# Allegro board usb-dvt-324pm1630.brd
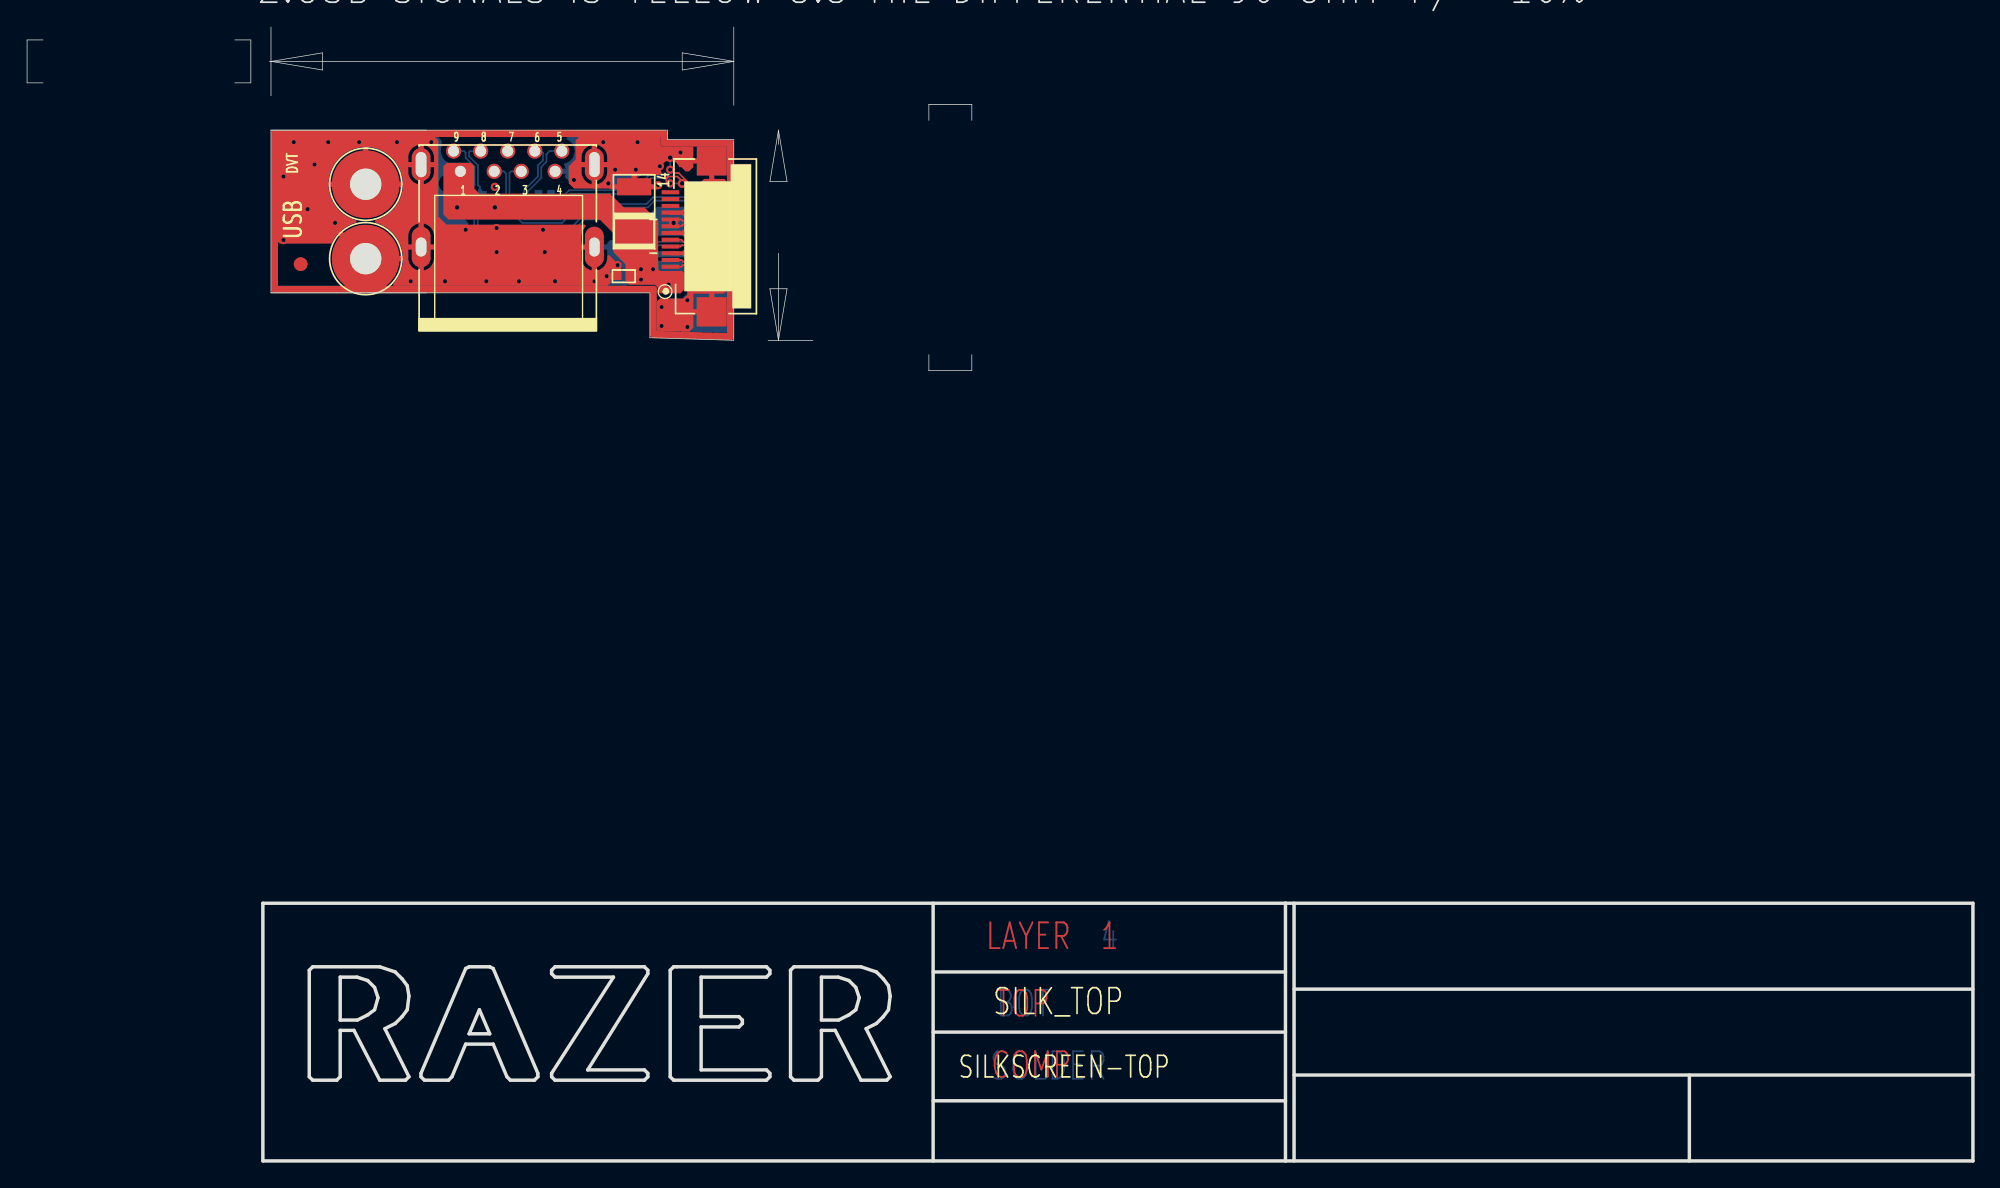
[diagram p0: board, top side]
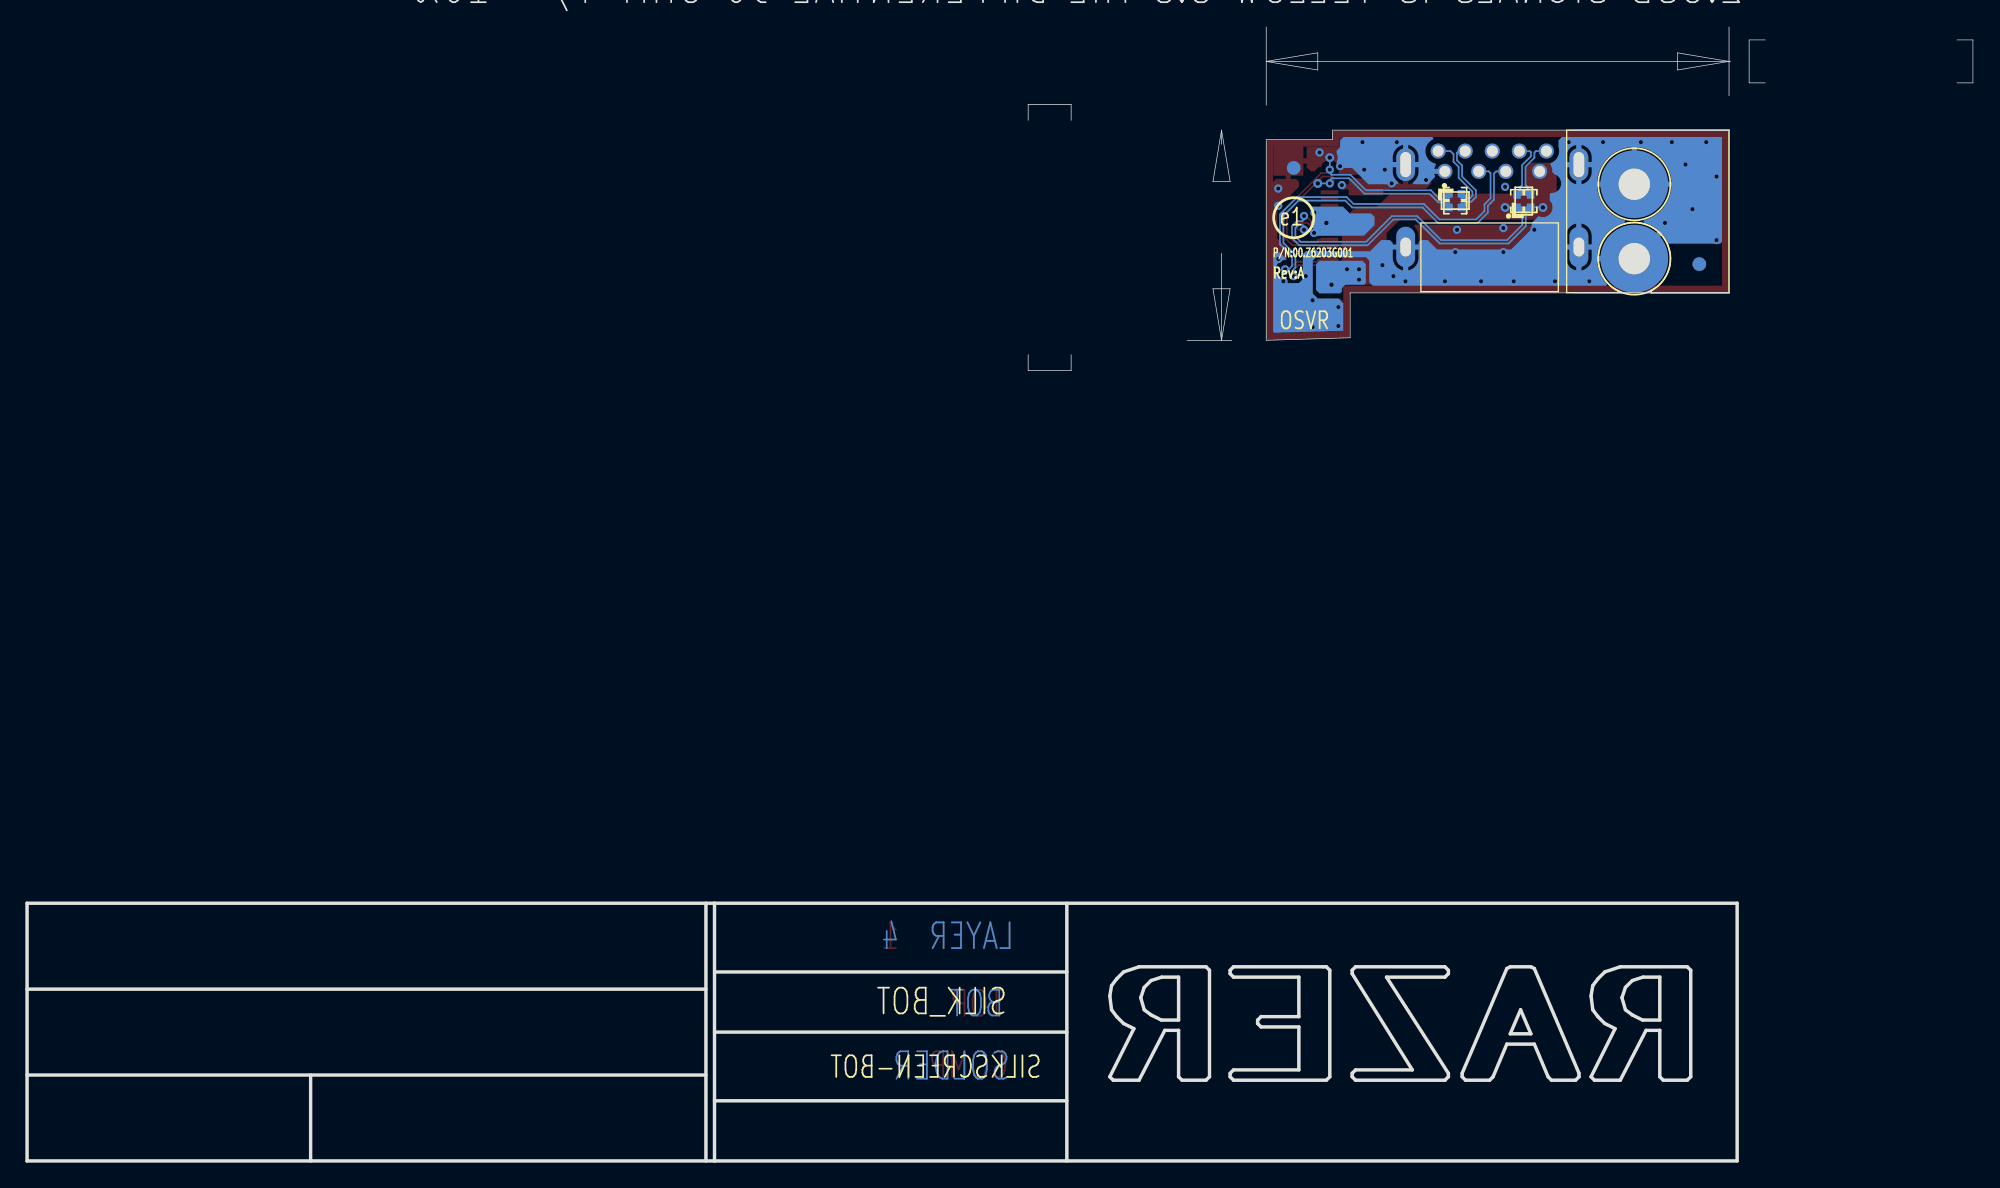
[diagram p1: board, bottom side, seen from below]

Outline 143.79 x 83.82 mm; copper layers: TOP, IN1, IN2, BOTTOM. Coordinates in mm from the lower left corner of the outline.
Outline path: 18.02,76.2 18.02,64.17 ; 18.02,76.2 29.52,76.2 ; 18.02,76.2 47.32,76.2 47.32,75.5 52.22,75.5 52.22,60.66 46.02,60.85 46.02,64.17 18.02,64.17 ; 18.02,64.17 29.52,64.17

## Design rules (mm)
net group DIFFPAIR34: nets SSRX+_R SSRX-_R
net group DIFFPAIR35: nets SSRX+ SSRX-
net group DIFFPAIR36: nets SSTX+_R SSTX-_R
net group DIFFPAIR37: nets SSTX+ SSTX-
net group DIFFPAIR38: nets D+ D-

## Placement (name value [footprint] x y rotation side)
C1000  6TPE220MAZB  [TANB]  44.86 70.36 90 top
C1001  470pF_X7R_50V  [C0402]  44.09 65.41 180 top
CN100  -  [SINGATRON_2UB4006-400101F]  35.52 64.35 0 top
J100  ACES_14PIN_FPC  [ACES_50502-14]  47.54 68.35 90 top
L1000  X_80_100MHz  [DLP11T]  38.25 70.99 180 bottom
L1001  X_80_100MHz  [DLP11T]  33.19 70.96 90 bottom
MT1001  MOUNTING HOLE  [HOLEC197D91]  25.02 72.2 90 top
MT1002  MOUNTING HOLE  [HOLEC197D91]  25.02 66.7 90 top
NOREF  -  []  18.02 76.2 0 top
NOREF#2  -  []  17.42 0 0 top
NOREF#3  -  []  -23.06 54.52 90 top
NOREF#4  -  []  -18.06 231.86 90 top
NOREF#5  -  []  -23.06 236.86 0 top
NOREF#6  -  [unnamed#2]  20.22 66.29 0 top
NOREF#7  -  []  52.22 60.66 90 top
NOREF#8  -  []  -23.06 236.86 0 top
NOREF#9  -  [unnamed#2]  20.22 66.29 180 bottom
NOREF#10  -  [unnamed#2]  50.19 73.41 180 bottom
R1000  0  [R0402]  38.25 71.5 0 bottom
R1001  0  [R0402]  38.25 70.48 0 bottom
R1002  0  [R0402]  33.7 70.96 270 bottom
R1003  0  [R0402]  32.68 70.96 270 bottom

## Library data of the parts
C1000 = TANB
C1001 = C0402
CN100 = SINGATRON_2UB4006-400101F
J100 = ACES_50502-14
L1000 L1001 = DLP11T
MT1001 MT1002 = HOLEC197D91
R1000-R1003 = R0402

## Footprints (pads in the part's own frame, mm; a bottom-side part is the same pattern mirrored in y, then rotated)
ACES_50502-14
  rect 0.305x1.295 smd: 1(-3.25,0) 2(-2.75,0) 3(-2.25,0) 4(-1.75,0) 5(-1.25,0) 6(-0.75,0) 7(-0.25,0) 8(0.25,0) 9(0.75,0) 10(1.25,0) 11(1.75,0) 12(2.25,0) 13(2.75,0) 14(3.25,0)
  rect 2.159x2.21 smd: S1(-5.575,-3.05) S2(5.575,-3.05)
C0402
  rect 0.559x0.559 smd: 1(-0.457,0) 2(0.457,0)
DLP11T
  rect 0.508x0.305 smd: 1(-0.625,0.275) 2(0.625,0.275) 3(0.625,-0.275) 4(-0.625,-0.275)
HOLEC197D91
  round 5.004 hole 2.311: 1(0,0)
R0402
  rect 0.559x0.559 smd: 1(-0.457,0) 2(0.457,0)
SINGATRON_2UB4006-400101F
  round 1.118 hole 0.813: 1(-3.5,8.8) 2(-1,8.8) 3(1,8.8) 4(3.5,8.8) 5(4,10.3) 6(2,10.3) 7(0,10.3) 8(-2,10.3) 9(-4,10.3)
  oval 1.397x2.438 hole 0.787x1.854: G1(-6.4,9.3) G2(6.4,9.3)
  oval 1.397x2.997 hole 0.787x1.397: G3(-6.4,3.208) G4(6.4,3.208)
TANB
  rect 1.27x2.54 smd: 1(-1.651,0) 2(1.651,0)
unnamed#2
  round 1.016 smd: 1(0,0)

## Nets
5V: C1000.1 C1001.1 CN100.1 J100.1 J100.2
D+: CN100.3 J100.4
D-: CN100.2 J100.3
SSRX+: J100.7 L1000.4 R1001.2
SSRX+_R: CN100.6 L1000.3 R1001.1
SSRX-: J100.6 L1000.1 R1000.2
SSRX-_R: CN100.5 L1000.2 R1000.1
SSTX+: J100.10 L1001.4 R1003.2
SSTX+_R: CN100.9 L1001.3 R1003.1
SSTX-: J100.9 L1001.1 R1002.2
SSTX-_R: CN100.8 L1001.2 R1002.1
USB_GND: C1000.2 C1001.2 CN100.4 CN100.7 CN100.G1 CN100.G2 CN100.G3 CN100.G4 J100.5 J100.8 J100.11 J100.S1 J100.S2 MT1001.1 MT1002.1

Pads without a net: J100 12 13 14; NOREF#6 1; NOREF#9 1; NOREF#10 1

## Via types
v1: diameter 0.61, hole 0.305, TOP to BOTTOM, 54 vias
v2: diameter 0.66, hole 0.33, TOP to BOTTOM, 6 vias

## Routing (per net, layer and track width the routed paths; a pad name or vN(x,y) marks a point on that pad's centre or on a via; arc(x,y) is an arc through that point)
5V:
  vias: v1(45.36,65.91) v1(45.36,65.15) v1(46.25,65.91) v2(47.4,64.77)
D+: length 28.9
  TOP w0.127: v1(50.83,65.91) 50.55,65.91 49.99,66.48 48.47,66.48 48.35,66.6 J100.4
  BOTTOM w0.127: CN100.3 35.77,73.15 35.65,73.03 35.65,71.16 36.09,70.72 36.09,70.21 36.71,69.6 39.42,69.6 40.56,70.74 45.77,70.74 46.27,71.25 49.94,71.25 51.21,69.98 51.21,67.76 50.32,66.87 50.32,66.15 50.55,65.91 v1(50.83,65.91)
D-: length 28.9
  TOP w0.127: J100.3 48.35,66.1 48.47,66.22 49.88,66.22 50.26,65.84 50.26,65.48 v1(50.19,65.41)
  BOTTOM w0.127: v1(50.19,65.41) 50.19,65.91 50.06,66.04 50.06,66.98 50.95,67.87 50.95,69.87 49.83,70.99 46.38,70.99 45.87,70.48 40.67,70.48 39.52,69.34 36.6,69.34 35.84,70.1 35.84,70.61 35.65,70.8 35.39,71.06 35.39,72.99 35.23,73.15 CN100.2
SSRX+: length 21.2
  TOP w0.127: v1(47.52,72.26) 47.4,72.26 47.24,72.42 47.24,72.67 47.35,72.77 48.05,72.77 48.77,72.05 50.7,70.13 50.7,68.45 50.19,67.94 48.5,67.94 48.35,68.1 J100.7
  BOTTOM w0.127: R1001.2 38.71,70.55 L1000.4 38.99,70.72 39.14,70.87 39.52,70.87 40.16,71.5 44.96,71.5 46.1,72.64 47.4,72.64 47.52,72.52 v1(47.52,72.26) v2(48.41,72.26)
SSRX+_R: length 5.9
  BOTTOM w0.127: CN100.6 38,74.65 38.13,74.53 38.13,73.97 37.74,73.59 37.74,72.77 36.73,71.75 36.73,71.25 37.06,70.92 37.31,70.92 37.51,70.72 L1000.3 37.8,70.55 R1001.1
SSRX-: length 21.2
  TOP w0.127: v1(47.52,73.28) 47.78,73.03 48.16,73.03 50.95,70.23 50.95,68.35 50.3,67.69 48.38,67.69 48.29,67.6 J100.6
  BOTTOM w0.127: v2(47.52,74.17) v1(47.52,73.28) 47.52,73.03 47.4,72.9 46,72.9 44.86,71.75 40.05,71.75 39.42,71.12 39.14,71.12 38.99,71.27 L1000.1 38.71,71.44 R1000.2
SSRX-_R: length 5.9
  BOTTOM w0.127: CN100.5 38.61,74.65 38.38,74.42 38.38,73.86 38,73.48 38,72.67 36.98,71.65 36.98,71.35 37.16,71.17 37.42,71.17 37.51,71.27 L1000.2 37.8,71.44 R1000.1
SSTX+: length 26.4
  TOP w0.127: v1(49.43,69.85) 49.3,69.85 48.92,69.48 48.47,69.48 48.35,69.6 J100.10
  BOTTOM w0.127: v2(31.78,70.48) 31.79,70.5 R1003.2 32.75,70.5 L1001.4 32.92,70.23 33.05,70.1 33.05,69.09 34.32,67.82 39.4,67.82 41.17,69.6 42.82,69.6 44.73,67.69 49.79,67.69 50.32,68.22 50.32,69.09 49.94,69.47 49.56,69.47 49.43,69.6 v1(49.43,69.85)
SSTX+_R: length 4.5
  BOTTOM w0.127: CN100.9 32.29,74.65 32.4,74.54 32.4,74.16 33.06,73.5 33.06,72.14 32.92,71.99 L1001.3 32.75,71.42 R1003.1
SSTX-: length 26.3
  TOP w0.127: v1(49.43,68.83) 49.81,68.83 49.91,68.94 49.91,69.22 49.77,69.35 49.17,69.35 49.04,69.22 48.47,69.22 48.35,69.1 J100.9
  BOTTOM w0.127: v2(34.57,70.48) 34.55,70.5 R1002.2 33.63,70.5 L1001.1 33.47,70.27 33.3,70.1 33.3,69.19 34.42,68.07 39.29,68.07 41.07,69.85 42.93,69.85 44.83,67.94 49.68,67.94 50.06,68.33 50.06,68.98 49.83,69.22 49.56,69.22 49.43,69.09 v1(49.43,68.83)
SSTX-_R: length 4.5
  BOTTOM w0.127: CN100.8 33.51,74.64 32.73,74.64 32.66,74.57 32.66,74.26 33.32,73.6 33.32,72.14 33.47,71.99 L1001.2 33.63,71.42 R1002.1
USB_GND: length 169
  TOP w0.279: J100.5 v1(48.71,67.1)
  TOP w0.305: v1(48.67,70.1) J100.11 ; J100.8 v1(48.69,68.6)
  TOP w0.381: CN100.G2 41.92,75.25 ; CN100.G2 40.84,73.65 ; CN100.G2 41.92,72.05 ; CN100.G2 43,73.65 ; v1(44.98,73.28) 44.86,73.15 44.86,72.01 ; CN100.G3 29.12,69.44 ; CN100.G3 30.2,67.56 ; CN100.G3 28.04,67.56 ; CN100.G3 29.12,65.68 ; 27.91,66.7 MT1002.1 22.76,68.96 22.5,68.96 ; 29.12,72.05 CN100.G1 ; CN100.G1 30.2,73.65 ; CN100.G1 29.12,75.25 ; CN100.G1 28.04,73.65 ; 50.59,64.24 J100.S1 49.11,62.77 ; 44.86,72.01 43.21,72.01 v1(42.95,72.26) ; 44.86,72.01 46.51,72.01 v1(46.63,72.14) ; 50.59,72.46 J100.S2 49.11,73.92 ; 22.14,72.2 MT1001.1 ; MT1001.1 25.02,75.08 ; MT1001.1 27.91,72.2 ; 41.92,65.68 CN100.G4 40.84,67.56
  TOP w0.508: v1(42.82,65.41) C1001.2 v1(43.64,66.22)
  IN1 w0.381: 40.84,67.56 CN100.G4 ; CN100.G4 41.92,69.44 ; CN100.G4 43,67.56 ; CN100.G4 41.92,65.68 ; CN100.G2 43,73.65 ; CN100.G2 40.84,73.65 ; CN100.G2 41.92,72.05 ; CN100.G2 41.92,75.25 ; CN100.G3 30.2,67.56 ; CN100.G3 29.12,65.68 ; CN100.G3 28.04,67.56 ; CN100.G3 29.12,69.44 ; 34.58,74.65 CN100.7 ; CN100.7 35.52,73.71 ; CN100.7 36.46,74.65 ; CN100.G1 29.12,75.25 ; CN100.G1 30.2,73.65 ; CN100.G1 28.04,73.65 ; CN100.G1 29.12,72.05 ; MT1002.1 26.94,66.7 ; MT1002.1 23.1,66.7 ; MT1002.1 25.02,68.62 ; 38.08,73.15 CN100.4 ; CN100.4 39.96,73.15 ; CN100.4 39.02,72.21 ; 25.02,70.28 MT1001.1 ; MT1001.1 23.1,72.2 ; MT1001.1 25.02,74.12 ; MT1001.1 26.94,72.2
  IN2 w0.381: 28.04,67.56 CN100.G3 ; CN100.G3 29.12,69.44 ; CN100.G3 30.2,67.56 ; CN100.G3 29.12,65.68 ; MT1002.1 26.94,66.7 ; MT1002.1 23.1,66.7 ; MT1002.1 25.02,68.62 ; 40.84,73.65 CN100.G2 ; CN100.G2 43,73.65 ; CN100.G2 41.92,75.25 ; CN100.G2 41.92,72.05 ; 34.58,74.65 CN100.7 ; CN100.7 36.46,74.65 ; CN100.7 35.52,73.71 ; CN100.G4 43,67.56 ; CN100.G4 41.92,65.68 ; CN100.G4 40.84,67.56 ; CN100.G4 41.92,69.44 ; 29.12,72.05 CN100.G1 ; CN100.G1 28.04,73.65 ; CN100.G1 30.2,73.65 ; CN100.G1 29.12,75.25 ; 23.1,72.2 MT1001.1 ; MT1001.1 25.02,70.28 ; MT1001.1 25.02,74.12 ; MT1001.1 26.94,72.2 ; CN100.4 39.96,73.15 ; CN100.4 38.08,73.15 ; CN100.4 39.02,72.21
  BOTTOM w0.381: 40.84,73.65 CN100.G2 ; CN100.G2 41.92,75.25 ; CN100.G2 43,73.65 ; 41.92,65.68 CN100.G4 ; CN100.G4 40.84,67.56 ; CN100.G4 43,67.56 ; 27.91,66.7 MT1002.1 22.63,69.09 22.5,69.09 ; MT1001.1 27.91,72.2 ; MT1001.1 25.02,75.08 ; MT1001.1 22.14,72.2 ; 29.12,65.68 CN100.G3 ; CN100.G3 30.2,67.56 ; CN100.G3 29.12,69.44 ; CN100.G3 28.04,67.56 ; 28.04,73.65 CN100.G1 ; CN100.G1 30.2,73.65 ; CN100.G1 29.12,72.05 ; CN100.G1 29.12,75.25 ; CN100.4 39.96,73.15
  vias: v1(18.95,72.77) v1(18.95,68.07) v1(19.71,75.31) v1(20.73,70.36) v1(21.23,73.66) v1(22.25,75.31) v1(22.76,69.34) v1(24.54,75.31) v1(27.33,75.31) v1(28.35,65.02) v1(29.87,75.31) v1(30.89,65.02) v1(32.41,68.83) v1(33.93,65.02) v1(34.57,72.01) v1(34.7,68.96) v1(34.7,67.18) v1(36.35,65.02) v1(38.13,68.83) v1(38.25,67.18) v1(39.01,65.02) v1(40.41,72.52) v1(41.94,65.02) v1(42.57,75.31) v1(43.46,73.28) v1(45.11,75.31) v1(46.76,73.53) v1(46.89,63.12) v1(46.89,61.72) v1(48.29,74.55) v1(48.79,63.63) v1(48.79,61.65) v1(49.3,65.41) v1(50.95,65.02) v1(51.33,71.88) v1(51.33,70.61) v1(51.33,66.67) v2(47.78,69.34)

## Copper pours and planes (outline as drawn; the poured copper is in the pictures)
5V on TOP (solid shape): 33.05,73.53 33.05,71.88 33.43,71.5 43.08,71.5 44.09,70.48 45.62,70.48 46.63,69.47 46.63,65.91 46.76,65.79 48.41,65.79 48.54,65.66 48.54,64.39 48.29,64.13 46.76,64.13 46.63,64.26 46.63,64.52 46.38,64.77 44.48,64.77 44.22,65.02 44.22,66.29 43.33,67.18 43.33,68.58 42.32,69.6 31.14,69.6 30.76,69.98 30.76,73.53 31.01,73.79 32.79,73.79
5V on BOTTOM (solid shape): 48.54,66.29 48.54,64.39 48.29,64.13 46.76,64.13 46.63,64.26 46.63,64.52 46.38,64.77 44.98,64.77 44.86,64.9 44.86,66.29 45.11,66.55 48.29,66.55
USB_GND on TOP (solid shape): 51.71,72.39 51.71,64.36 51.46,64.11 49.23,64.11 49.23,61.59 48.94,61.3 46.53,61.37 46.53,63.53 46.76,63.75 48.54,63.75 48.79,64.01 48.79,65.53 48.92,65.66 49.43,65.66 49.52,65.57 49.52,65.54 50.03,64.74 50.85,65.23 51.51,65.94 50.8,66.6 50.73,66.63 50.7,66.7 50.7,67.46 51.4,68.16 51.4,70.42 49.81,72.01 49.81,72.39 50.01,72.59 51.51,72.59
USB_GND on TOP (solid shape): outline of 128 points within 40.03,71.88 49.23,75.69
USB_GND on TOP (solid shape): outline of 414 points within 18.54,64.69 43.84,75.69
USB_GND on BOTTOM (solid shape): 48.91,70.55 49,70.48 48.98,70.37 48.74,69.88 48.93,69.38 48.95,69.34 48.93,69.31 48.75,68.94 48.81,68.54 48.8,68.44 48.72,68.39 45.02,68.39 44.22,69.19 44.22,69.79 44.48,70.04 46.06,70.04 46.56,70.55
USB_GND on BOTTOM (solid shape): 46.76,75.44 46.76,74.93 47.02,74.68 47.02,74.46 47.01,74.45 46.94,74.16 47.02,73.88 47.02,73.53 46.89,73.41 45.88,73.41 44.67,72.2 42.57,72.2 42.47,72.27 42.51,72.38 42.78,72.71 42.87,73.13 42.87,74.17 41.92,75.13 40.97,74.17 40.97,73.13 41.06,72.71 41.33,72.38 41.36,72.27 41.27,72.2 40.28,72.2 39.75,72.74 39.75,72.79 39.83,73.19 39.7,73.59 39.69,73.68 39.76,73.74 40.45,74.56 39.93,75.5 39.87,75.61 39.97,75.69 46.51,75.69
USB_GND on BOTTOM (solid shape): outline of 549 points within 18.54,61.22 51.71,75.69
USB_GND on IN1 (solid shape): outline of 1464 points within 18.54,61.22 51.71,75.69
USB_GND on IN2 (solid shape): outline of 1463 points within 18.54,61.22 51.71,75.69

## Text on the board
Ref Des/Silkscreen Bottom: P/N:00.Z6203G001 | Rev:A | e1 | OSVR
User.Comments: OBLONG 31X55 | OBLONG 31X73
Board Geometry/Outline: 1.Default 5MIL IS 55 OHM +/- 10% | 2.USB SIGNALS IS YELLOW 5:5 MIL DIFFERENTIAL 90 OHM +/- 10% | TRACE:SPACE
Ref Des/Silkscreen Top: DVT | USB
NCLEGEND-1-4: FIGURE | SIZE | 12.0 | 32.0 | 91.0 | DRILL CHART: TOP to BOTTOM | ALL UNITS ARE IN MILS | PLATED | QTY | 54 | 9 | 2
User.11: 1.00 | 1 | 30 | 36 | 1.00 THICKNESS | 4.51 | 26.00 | 71.00 | 2- dia2.40 HOLE
User.18: .07874" | .028" | .200" | .03937" | .0120"
User.25: Place restrictions on H=0mm
